# Altium PCB bcomed.PcbDoc
Units mm, origin at the board's own origin, x right, y up, seen from the top; angles counter-clockwise.
Board outline 178.94 x 147.32 mm, 2 copper layers (Top Layer, Bottom Layer); 79 components, 71 nets, 264 pads, 45 vias.
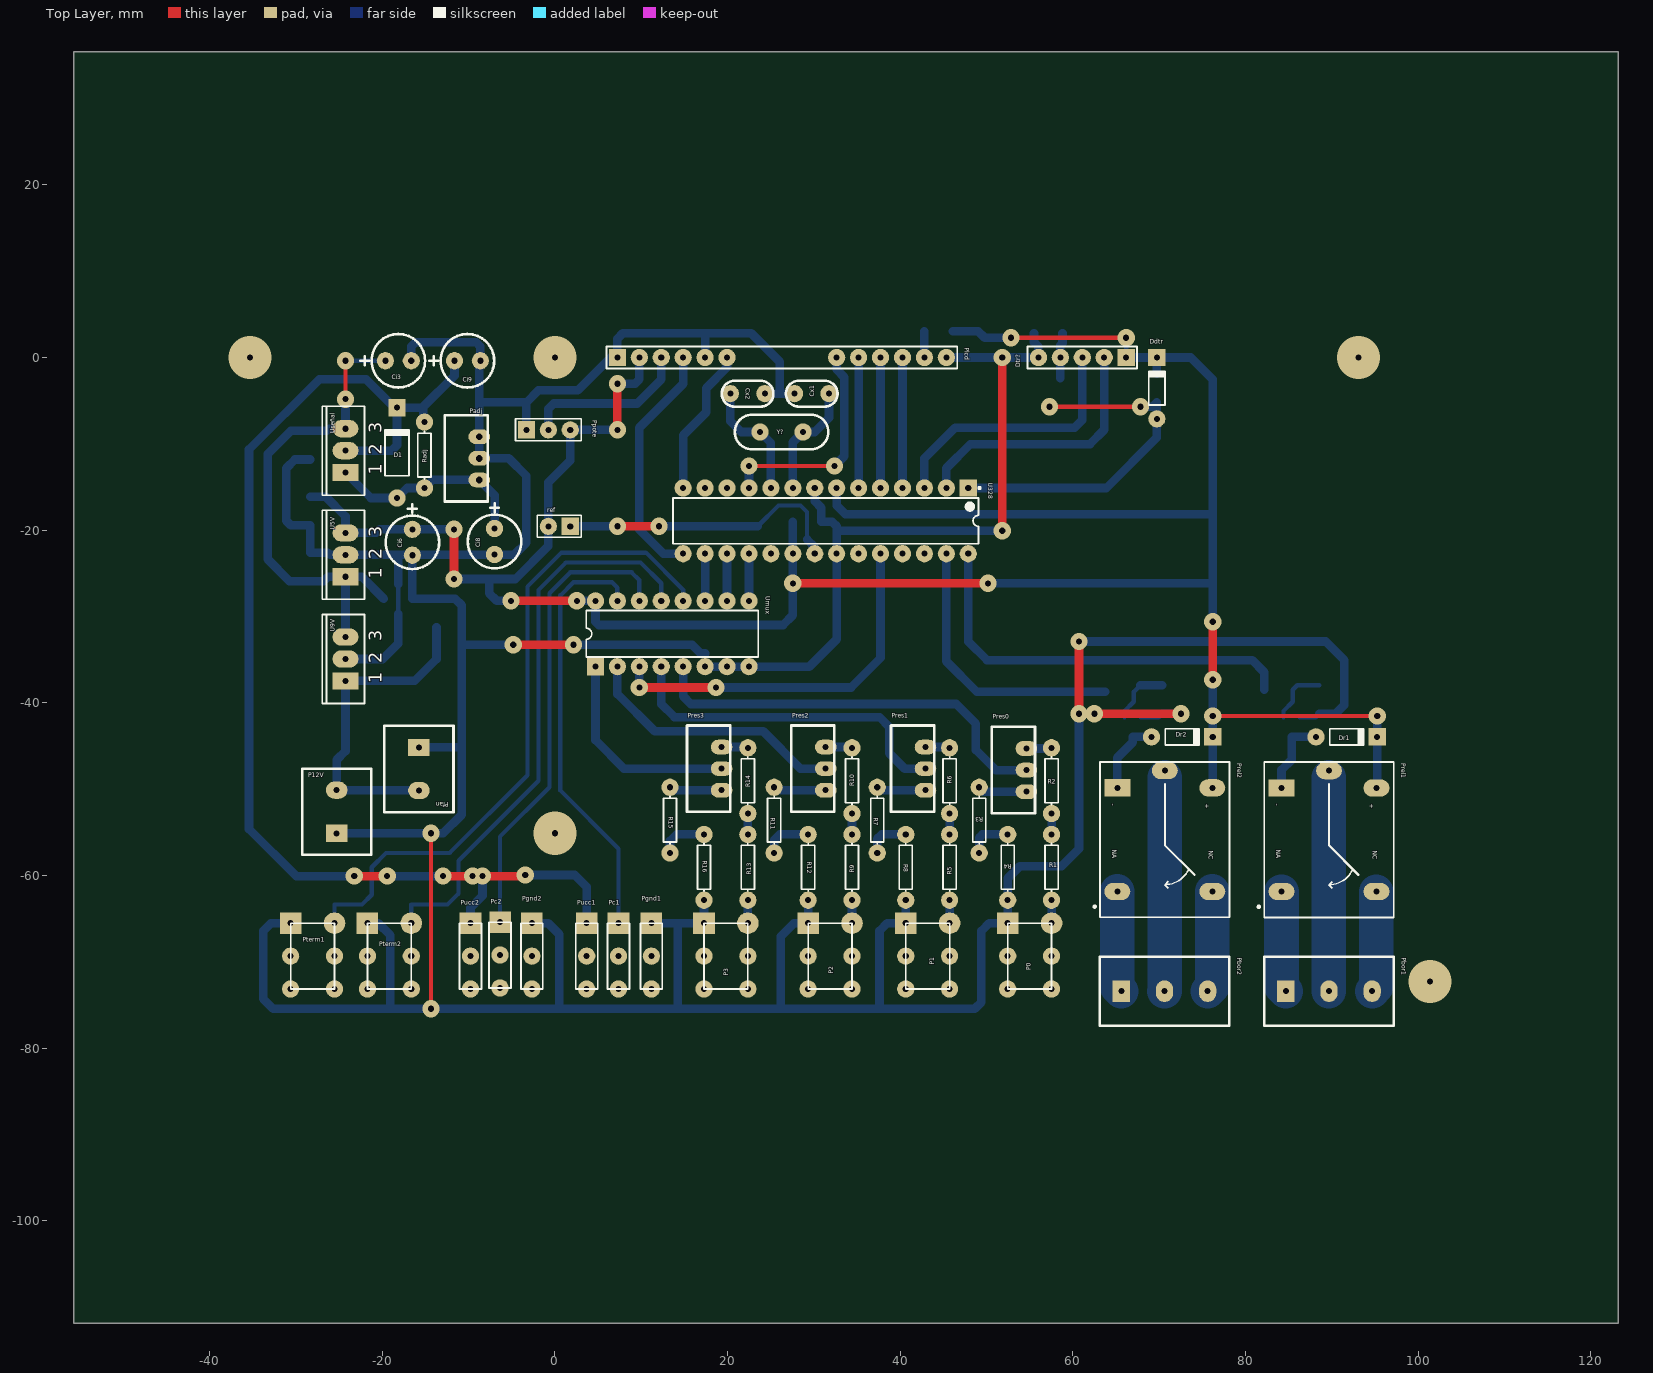
[diagram p0: Top Layer view]
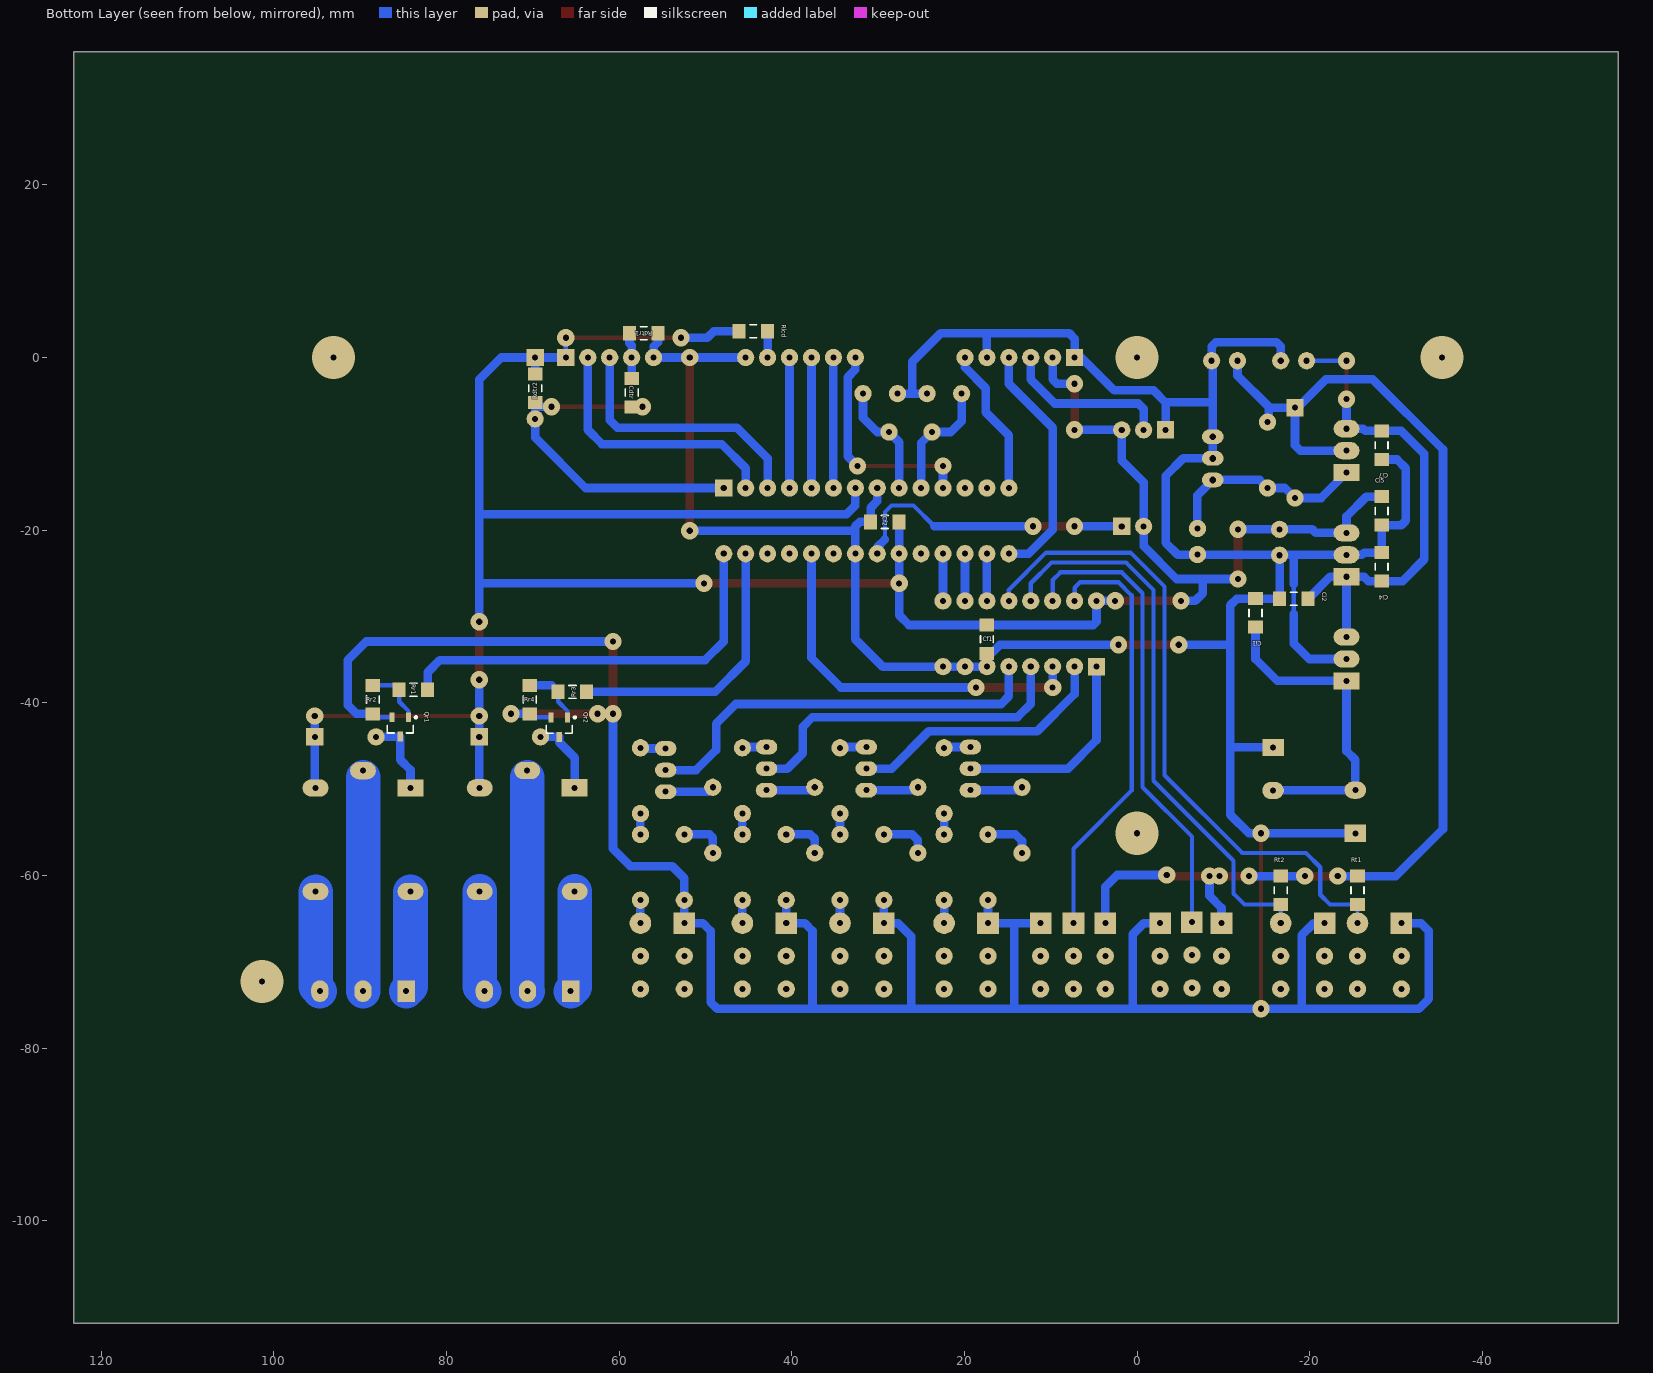
[diagram p1: Bottom Layer view, seen from below]

## Layer stack, top to bottom
Top Solder: solder mask 0.0102, Solder Resist, Dk 3.5
Top Layer: signal copper 0.0356
Dielectric 1: dielectric 0.32, FR-4, Dk 4.8
Bottom Layer: signal copper 0.0356
Bottom Solder: solder mask 0.0102, Solder Resist, Dk 3.5

## Board outline
-55.753,-111.887 -55.753,35.433 123.19,35.433 123.19,-111.887

## Design rules (kind name [scope] priority, off if disabled: settings)
Clearance [All] p1 off: gap=0.254 ignorepadtopadclearanceinfootprint=FALSE except(0: Arc-Hole Track-Hole SMDPad-Hole THPad-Hole Via-Hole Fill-Hole Poly-Hole Region-Hole Text-Hole)
ComponentClearance [All] p1 off: gap=0.254 collisioncheckmode=3 verticalgap=0.254 showdistances=FALSE
Height [All] p1 off: minheight=0 maxheight=25.4 prefheight=12.7
PolygonConnect [All] p1: connectstyle=Relief reliefconductorwidth=0.254 reliefentries=4 polygonreliefangle="90 Angle" airgapwidth=0.254
RoutingVias [All] p1: holewidth=0.711 width=1.27 viastyle="Through Hole" minholewidth=0.711 minwidth=1.27 maxholewidth=0.711 maxwidth=1.27
SolderMaskExpansion [All] p1: expansion=0.102
Width [All] p1: maxlimit=10 minlimit=0.5 preferedwidth=1
28 further rules are at their usual default settings.

## Components (designator, comment, footprint, x,y, rotation, side; value= is the part's Value field where it differs from the comment)
Cdtr "Cap" 1206ancho 58.547,-4.064 r0 bottom value=100pF
Cf1 "Cap" 1206ancho 17.399,-32.639 r180 bottom value=100nF
Cf2 "Cap" 1206ancho 29.21,-19.05 r270 bottom value=100nF
Ci1 "Cap" 1206ancho -13.716,-29.591 r0 bottom value=100pF
Ci2 "Cap" 1206ancho -18.161,-27.94 r270 bottom value=100pF
Ci3 "Cap Pol1" CAP-D6P3 -15.065,-0.381 r180 top value=10uF
Ci4 "Cap" 1206ancho -28.321,-24.257 r0 bottom value=100pF
Ci5 "Cap" 1206ancho -28.321,-17.78 r180 bottom value=100pF
Ci6 "Cap Pol1" CAP-D6P3 -16.51,-24.48 r90 top value=10uF
Ci7 "Cap" 1206ancho -28.321,-10.16 r0 bottom value=100pF
Ci8 "Cap Pol1" CAP-D6P3 -6.985,-24.384 r90 top value=10uF
Ci9 "Cap Pol1" CAP-D6P3 -7.064,-0.381 r180 top value=1uF
Cx1 "Cap" Cap4 31.75,-4.191 r180 top value=100pF
Cx2 "Cap" Cap4 20.32,-4.191 r0 top value=100pF
D1 "Diode 1N4007" DO-41 -18.288,-11.049 r90 top
Ddtr "Diode 1N4148" DO-35 69.723,-3.556 r90 top
Dr1 "Diode 1N4148" DO-35 91.7,-43.942 r0 top
Dr2 "Diode 1N4148" DO-35 72.65,-43.942 r0 top
Dtr? "Header 5" HDR1X5 66.167,0 r180 top
P0 "Header 3X2" "conector cable" 57.531,-65.532 r90 top
P1 "Header 3X2" "conector cable" 45.72,-65.532 r90 top
P2 "Header 3X2" "conector cable" 34.417,-65.532 r90 top
P3 "Header 3X2" "conector cable" 22.352,-65.532 r90 top
P12V "Header 2" Bornera-2 -25.273,-55.118 r90 top
Padj "Header 3" PRESET2#1 -8.763,-14.184 r90 top
Pbor1 "Header 3" Bornera-3 89.662,-73.406 r0 top
Pbor2 "Header 3" Bornera-3 70.612,-73.406 r0 top
Pc1 "Header 3" "conector cable simple" 7.366,-66.802 r90 top
Pc2 "Header 3" "conector cable simple" -6.35,-66.675 r90 top
Pfan "Header 2" Bornera-2 -15.748,-45.165 r270 top
Pgnd1 "Header 3" "conector cable simple" 11.176,-66.802 r90 top
Pgnd2 "Header 3" "conector cable simple" -2.667,-66.802 r90 top
Plcd "Header 16" HDR1X16 7.239,0 r0 top
Ppote "Header 3" HDR1X3 -3.302,-8.382 r0 top
Prel1 "Header 5" "Relay 5V" 85.344,-65.532 r270 top
Prel2 "Header 5" "Relay 5V" 66.333,-65.518 r270 top
Pres0 "Header 3" PRESET2#2 54.61,-50.292 r90 top
Pres1 "Header 3" PRESET2#2 42.926,-50.125 r90 top
Pres2 "Header 3" PRESET2#2 31.369,-50.125 r90 top
Pres3 "Header 3" PRESET2#2 19.304,-50.125 r90 top
Pterm1 "Header 3X2" "conector cable" -25.527,-65.532 r90 top
Pterm2 "Header 3X2" "conector cable" -16.637,-65.532 r90 top
Pucc1 "Header 3" "conector cable simple" 3.683,-66.802 r90 top
Pucc2 "Header 3" "conector cable simple" -9.779,-66.802 r90 top
Qr1 "BC817-40" SOT-23A_N 85.344,-42.799 r270 bottom
Qr2 "BC817-40" SOT-23A_N 66.925,-42.817 r270 bottom
R1 "Res1" AXIAL-0.3 57.531,-59.055 r90 top value=1K
R2 "Res1" AXIAL-0.3 57.531,-49.022 r90 top value=1K
R3 "Res1" AXIAL-0.3 49.149,-53.594 r270 top value=1K
R4 "Res1" AXIAL-0.3 52.451,-59.055 r270 top value=1K
R5 "Res1" AXIAL-0.3 45.72,-59.055 r90 top value=1K
R6 "Res1" AXIAL-0.3 45.72,-49.022 r90 top value=1K
R7 "Res1" AXIAL-0.3 37.338,-53.594 r270 top value=1K
R8 "Res1" AXIAL-0.3 40.64,-59.055 r270 top value=1K
R9 "Res1" AXIAL-0.3 34.417,-59.055 r90 top value=1K
R10 "Res1" AXIAL-0.3 34.417,-49.022 r90 top value=1K
R11 "Res1" AXIAL-0.3 25.4,-53.594 r270 top value=1K
R12 "Res1" AXIAL-0.3 29.337,-59.055 r270 top value=1K
R13 "Res1" AXIAL-0.3 22.352,-59.055 r90 top value=1K
R14 "Res1" AXIAL-0.3 22.352,-49.022 r90 top value=1K
R15 "Res1" AXIAL-0.3 13.335,-53.594 r270 top value=1K
R16 "Res1" AXIAL-0.3 17.272,-59.055 r270 top value=1K
Radj "Res1" AXIAL-0.3 -15.113,-11.303 r90 top value=120
Rdtr1 "Res1" 1206ancho 57.15,2.794 r90 bottom value=10K
Rdtr2 "Res1" 1206ancho 69.723,-3.556 r180 bottom value=1K
ref "Header 2" HDR1X2 1.778,-19.558 r180 top
Rlcd "Res1" 1206ancho 44.45,3.048 r270 bottom value=100
Rr1 "Res1" 1206ancho 83.82,-38.481 r90 bottom value=1K
Rr2 "Res1" 1206ancho 88.519,-39.624 r180 bottom value=10K
Rr3 "Res1" 1206ancho 65.405,-38.735 r90 bottom value=1K
Rr4 "Res1" 1206ancho 70.358,-39.624 r180 bottom value=10K
Rt1 "Res1" 1206ancho -25.527,-61.722 r180 bottom value=10K
Rt2 "Res1" 1206ancho -16.637,-61.722 r180 bottom value=10K
U5V "MC78M05CT" 221A-09 -24.257,-22.86 r90 top
U9V "MC78M09CT" 221A-09 -24.257,-34.925 r90 top
U328 "ATmega328P-PU" 28P3 31.369,-18.923 r270 top
Umux "MC14051BCL" 620-10 13.589,-32.004 r0 top
Useñal "LM317BT" 221A-06 -24.257,-10.795 r90 top
Y? "XTAL" Cristal 23.749,-8.636 r0 top

## Footprints (in the part's own frame and the unit in brackets; to place one, negate y for a bottom-side part, rotate by r counter-clockwise, add the part's x,y. Pads: shape width x height; smd on the part's side, far side on the other; paste and mask are expansions set on the pad)
28P3 [mm] "DIP, 28-Leads, Row Spacing 7.62mm, Pitch 2.54mm, Body 34.67x7.3mm"
  rect 2x2 hole 0.7: 1(-3.81,16.51)
  round 2 hole 0.7: 2(-3.81,13.97) 3(-3.81,11.43) 4(-3.81,8.89) 5(-3.81,6.35) 6(-3.81,3.81) 7(-3.81,1.27) 8(-3.81,-1.27) 9(-3.81,-3.81) 10(-3.81,-6.35) 11(-3.81,-8.89) 12(-3.81,-11.43) 13(-3.81,-13.97) 14(-3.81,-16.51) 15(3.81,-16.51) 16(3.81,-13.97) 17(3.81,-11.43) 18(3.81,-8.89) 19(3.81,-6.35) 20(3.81,-3.81) 21(3.81,-1.27) 22(3.81,1.27) 23(3.81,3.81) 24(3.81,6.35) 25(3.81,8.89) 26(3.81,11.43) 27(3.81,13.97) 28(3.81,16.51)
  silkscreen extent -3.93,-17.7 2.65,17.94, body extent -3.6,-17.65 3.6,17.65, height 4.58
221A-06 [mm] "TO, Thru-Hole, Vertical, Heatsink Mounted; 3 In-Line Leads; Pitch 2.54 mm"
  rect 2x3 hole 0.7: 1(-2.54,0)
  oval 2x3 hole 0.7: 2(0,0) 3(2.54,0)
  silkscreen extent -5.15,-2.2 5.15,2.7
221A-09 [mm] "TO, Thru-Hole, Vertical, Heatsink Mounted; 3 In-Line Leads; Pitch 2.54 mm"
  rect 2x3 hole 0.7: 1(-2.54,0)
  oval 2x3 hole 0.7: 2(0,0) 3(2.54,0)
  silkscreen extent -5.15,-2.2 5.15,2.7
620-10 [mm] "DIP; 16 Leads; Row Spacing 7.62 mm; Pitch 2.54 mm"
  rect 2x2 hole 0.7: 1(-8.89,-3.81)
  round 2 hole 0.7: 2(-6.35,-3.81) 3(-3.81,-3.81) 4(-1.27,-3.81) 5(1.27,-3.81) 6(3.81,-3.81) 7(6.35,-3.81) 8(8.89,-3.81) 9(8.89,3.81) 10(6.35,3.81) 11(3.81,3.81) 12(1.27,3.81) 13(-1.27,3.81) 14(-3.81,3.81) 15(-6.35,3.81) 16(-8.89,3.81)
  silkscreen extent -9.95,-2.7 9.95,2.7
1206ancho [mm]
  rect 1.7x1.5 smd: 1(0,-1.651) 2(0,1.651)
  silkscreen extent -0.75,-0.4 0.75,0.4
AXIAL-0.3 [mm] "Axial Device, Thru-Hole; 2 Leads; 0.3 in Pin Spacing"
  round 2 hole 0.7: 1(-3.81,0) 2(3.81,0)
  silkscreen extent -2.77,-0.76 2.77,0.76
Bornera-2 [mm]
  rect 2x2.5 hole 0.7: 1(0,0)
  oval 2x2.5 hole 0.7: 2(5,0)
  silkscreen extent -2.5,-4 7.5,4
Bornera-3 [mm]
  rect 2x2.5 hole 0.7: 1(-5,0)
  oval 2x2.5 hole 0.7: 2(0,0) 3(5,0)
  silkscreen extent -7.5,-4 7.5,4
Cap4 [mm]
  round 2 hole 0.7: 1(0,0) 2(4,0)
  silkscreen extent -0.99,-1.5 4.99,1.5
CAP-D6P3 [mm]
  round 2 hole 0.7: 1(4.572,0) 2(1.572,0)
  silkscreen extent -0.03,-3.1 7.49,3.1
"conector cable" [mm]
  rect 2.5x2.5 hole 0.7: 1(0,5.08)
  round 2.5 hole 0.7: 2(0,0)
  round 2 hole 0.7: 3(-3.81,5.08) 4(-3.81,0) 5(-7.62,5.08) 6(-7.62,0)
  silkscreen extent -7.62,0 0,5.08
"conector cable simple" [mm]
  rect 2.5x2.5 hole 0.7: 1(1.27,0)
  round 2 hole 0.7: 2(-2.54,0) 3(-6.35,0)
  silkscreen extent -6.35,-1.27 1.27,1.27
Cristal [mm]
  round 2 hole 0.7: 1(0,0) 2(5,0)
  silkscreen extent -2.9,-2 7.91,2.02, body extent -3,-2.25 8,2.25, height 13.2
DO-35 [mm] "Diode, Axial; Body 3.8 x 1.9 mm (LxDia. max), Lead Dia. 0.53 mm (max)"
  round 2 hole 0.7: 1(-3.55,0)
  rect 2x2 hole 0.7: 2(3.55,0)
  silkscreen extent -1.95,-0.95 2.05,0.95
DO-41 [mm] "Diode, Axial; Body 5.2 x 2.7 mm (LxDia. max), Lead Dia. 0.86 mm (max)"
  round 2 hole 0.7: 1(-5.23,0)
  rect 2x2 hole 0.7: 2(5.23,0)
  silkscreen extent -2.65,-1.4 2.75,1.4
HDR1X2 [mm] "Connector; Header; 2 Position"
  rect 2x2 hole 0.7: 1(0,0)
  round 2 hole 0.7: 2(2.54,0)
  silkscreen extent -1.27,-1.27 3.81,1.27
HDR1X3 [mm] "Connector; Header; 3 Position"
  rect 2x2 hole 0.7: 1(0,0)
  round 2 hole 0.7: 2(2.54,0) 3(5.08,0)
  silkscreen extent -1.27,-1.27 6.35,1.27
HDR1X5 [mm] "Connector; Header; 5 Position"
  rect 2x2 hole 0.7: 1(0,0)
  round 2 hole 0.7: 2(2.54,0) 3(5.08,0) 4(7.62,0) 5(10.16,0)
  silkscreen extent -1.27,-1.27 11.43,1.27
HDR1X16 [mm] "Connector; Header; 16 Position"
  rect 2x2 hole 0.7: 1(0,0)
  round 2 hole 0.7: 2(2.54,0) 3(5.08,0) 4(7.62,0) 5(10.16,0) 6(12.7,0) 11(25.4,0) 12(27.94,0) 13(30.48,0) 14(33.02,0) 15(35.56,0) 16(38.1,0)
  round 0 all layers, no hole: 7(15.24,0) 8(17.78,0) 9(20.32,0) 10(22.86,0)
  silkscreen extent -1.27,-1.27 39.37,1.27
PRESET2#1 [mm]
  oval 1.7x2.5 hole 0.8: 1(0,0) 2(2.5,0) 3(5,0)
  silkscreen extent -2.5,-1 7.5,4
PRESET2#2 [mm]
  oval 1.7x2.5 hole 0.7: 1(0,0) 2(2.5,0) 3(5,0)
  silkscreen extent -2.5,-1 7.5,4
"Relay 5V" [mm]
  oval 2x3 hole 0.7: 1(-17.669,4.318) 2(-3.669,9.818) 3(-3.669,-1.182) 4(-15.669,9.818)
  rect 2x3 hole 0.7: 5(-15.669,-1.182)
  silkscreen extent -18.67,-3.93 -0.67,11.82
SOT-23A_N [mm] "SOT23, 3-Leads, Body 2.9x1.3mm, Pitch 0.95mm, Lead Span 2.3mm, IPC Medium Density"
  rect 1.15x0.6 smd: 1(-1.125,0.95) 2(-1.125,-0.95) 3(1.125,0)
  silkscreen extent -1.25,-1.5 0.7,1.92, body extent -0.7,-1.5 0.7,1.5, height 1.09

## Part data
Cdtr Cf1 Cf2 Ci1 Ci2 Ci4 Ci5 Ci7 Cx1 Cx2: "Capacitor", LatestRevisionDate=17-Jul-2002, LatestRevisionNote="Re-released for DXP Platform.", PackageDescription="Radial Cap, Thru-Hole; 2 Leads; 0.3 in Pin Spacing", PackageReference=RAD-0.3, Published=8-Jun-2000, Publisher="Altium Limited"
Ci3 Ci6 Ci8 Ci9: "Polarized Capacitor (Radial)", LatestRevisionDate=17-Jul-2002, LatestRevisionNote="Re-released for DXP Platform.", PackageDescription="Polarized Capacitor (Radial); 2 Leads", PackageReference=RB7.6-15, Published=8-Jun-2000, Publisher="Altium Limited"
D1: "1 Amp General Purpose Rectifier", Code_JEDEC=DO-204-AL, ComponentLink1Description="Manufacturer Link", ComponentLink1URL=http://www.fairchildsemi.com/, ComponentLink2Description=Datasheet, ComponentLink2URL=http://www.fairchildsemi.com/ds/1N%2F1N4001.pdf, DatasheetVersion=1998, LatestRevisionDate=17-Jul-2002, LatestRevisionNote="Re-released for DXP Platform.", PackageDescription="Diode, Axial; Body 5.2 x 2.7 mm (LxDia. max), Lead Dia. 0.86 mm (max)", PackageReference=DO-41, PackageVersion=Aug-1999, Published=8-Jun-2000, Publisher="Altium Limited"
Ddtr Dr1 Dr2: "High Conductance Fast Diode", Code_JEDEC=DO-204-AH, ComponentLink1Description="Manufacturer Link", ComponentLink1URL=http://www.fairchildsemi.com/, ComponentLink2Description=Datasheet, ComponentLink2URL=http://www.fairchildsemi.com/ds/1N%2F1N4148.pdf, DatasheetVersion=1997, LatestRevisionDate=17-Jul-2002, LatestRevisionNote="Re-released for DXP Platform.", PackageDescription="Diode, Axial; Body 3.8 x 1.9 mm (LxDia. max), Lead Dia. 0.53 mm (max)", PackageReference=DO-35, Published=8-Jun-2000, Publisher="Altium Limited"
Dtr? Prel1 Prel2: "Header, 5-Pin", LatestRevisionDate=17-Jul-2002, LatestRevisionNote="Re-released for DXP Platform.", Publisher="Altium Limited"
P0 P1 P2 P3 Pterm1 Pterm2: "Header, 3-Pin, Dual row", LatestRevisionDate=17-Jul-2002, LatestRevisionNote="Re-released for DXP Platform.", Publisher="Altium Limited"
P12V Pfan ref: "Header, 2-Pin", LatestRevisionDate=17-Jul-2002, LatestRevisionNote="Re-released for DXP Platform.", Publisher="Altium Limited"
Padj Pbor1 Pbor2 Pc1 Pc2 Pgnd1 Pgnd2 Ppote Pres0 Pres1 Pres2 Pres3 Pucc1 Pucc2: "Header, 3-Pin", LatestRevisionDate=17-Jul-2002, LatestRevisionNote="Re-released for DXP Platform.", Publisher="Altium Limited"
Plcd: "Header, 16-Pin", LatestRevisionDate=17-Jul-2002, LatestRevisionNote="Re-released for DXP Platform.", Publisher="Altium Limited"
Qr1 Qr2: "NPN General Purpose Amplifier", ComponentLink1Description="Manufacturer Link", ComponentLink1URL=http://www.fairchildsemi.com/, ComponentLink2Description="Discontinuation Notice", ComponentLink2URL=http://www.fairchildsemi.com/obsolete/obs.jsp, DatasheetVersion=1997, LatestRevisionDate=20-Nov-2009, LatestRevisionNote="IPC-7351 Footprint Added.", PackageDescription="3-Pin SOT-23 Package 0.95 mm Pitch, 2.3 mm Lead Span", PackageReference=SOT-23A, PackageVersion=Sep-1998, Published=8-Jun-2000, Publisher="Altium Limited"
R1 R2 R3 R4 R5 R6 R7 R8 R9 R10 R11 R12 R13 R14 R15 R16 Radj Rdtr1 Rdtr2 Rlcd Rr1 Rr2 Rr3 Rr4 Rt1 Rt2: "Resistor", LatestRevisionDate=17-Jul-2002, LatestRevisionNote="Re-released for DXP Platform.", PackageDescription="Axial Device, Thru-Hole; 2 Leads; 0.3 in Pin Spacing", PackageReference=AXIAL-0.3, Published=8-Jun-2000, Publisher="Altium Limited"
U5V U9V: "Three-Terminal Medium Current Positive Voltage Regulator", Code_JEDEC=TO-262-AA, ComponentLink1Description="Manufacturer Link", ComponentLink1URL=http://www.onsemi.com/site/products/taxonomy/0,4438,503,00.html, ComponentLink2Description=Datasheet, ComponentLink2URL=http://www.onsemi.com/pub/Collateral/MC78M00-D.PDF, DatasheetVersion=Apr-2000, Note="Heatsink surface connected to Pin 2", PackageDescription="TO, Thru-Hole, Vertical, Heatsink Mounted; 3 In-Line Leads; Pitch 2.54 mm", PackageReference=221A-09, Published=15-Apr-2002, Publisher="Altium Limited"
U328: "8-bit AVR Microcontroller, 32KB Flash, 1KB EEPROM, 2KB SRAM, 28-pin PDIP, Industrial Grade (-40°C to 85°C)", Supplier Part Number 1=ATMEGA328P-PU-ND, ComponentLink1Description="Manufacturer Link", ComponentLink1URL=http://www.atmel.com/products/avr/default.asp?, ComponentLink2Description="ATmega48A/48PA/88A/88PA/168A/168PA/328/328P Datasheet", ComponentLink2URL=http://www.atmel.com/dyn/resources/prod_documents/8271.pdf, ComponentLink3Description="ATmega48A/48PA/88A/88PA/168A/168PA/328/328P Summary", ComponentLink3URL=http://www.atmel.com/dyn/resources/prod_documents/8271S.pdf, ComponentLink4Description="Atmel.com Home", ComponentLink4URL=http://www.atmel.com, DatasheetVersion="revA, Jan-2010", PackageDescription="28-lead (0.300\"/7.62mm Wide) Plastic Dual Inline Package (PDIP)", PackageReference=28P3, PackageVersion="revB, Sep-2001", Published=1-Apr-2010, Publisher="Altium Limited", Supplier 1=Digi-Key, Supplier 2=Farnell, Supplier 3=Mouser, Supplier Part Number 2=1715487, Supplier Part Number 3=556-ATMEGA328P-PU
Umux: "8-Channel Analog Multiplexer/Demultiplexer", ComponentLink1Description="Manufacturer Link", ComponentLink1URL=http://www.onsemi.com/, ComponentLink2Description=Datasheet, ComponentLink2URL=http://www.onsemi.com/pub/Collateral/MC14051B-D.PDF, DatasheetVersion=1995, PackageDescription="DIP; 16 Leads; Row Spacing 7.62 mm; Pitch 2.54 mm", PackageReference=620-10, PackageVersion=1996, Published=15-Apr-2002, Publisher="Altium Limited"
Useñal: "Three-Terminal Adjustable Output Positive Voltage Regulator", Code_JEDEC=TO-262-AA, ComponentLink1Description="Manufacturer Link", ComponentLink1URL=http://www.onsemi.com/site/products/taxonomy/0,4438,503,00.html, ComponentLink2Description=Datasheet, ComponentLink2URL=http://www.onsemi.com/pub/Collateral/LM317-D.PDF, DatasheetVersion=1996, Note="Heatsink surface connected to Pin 2", PackageDescription="TO, Thru-Hole, Vertical, Heatsink Mounted; 3 In-Line Leads; Pitch 2.54 mm", PackageReference=221A-06, PackageVersion=1997, Published=15-Apr-2002, Publisher="Altium Limited"
Y?: "Crystal Oscillator", LatestRevisionDate=17-Jul-2002, LatestRevisionNote="Re-released for DXP Platform.", PackageDescription="Crystal, Thru-Hole; 2 Leads; Body 3.1 x 8.2 mm (Dia.xH)", PackageReference=R38, Published=8-Jun-2000, Publisher="Altium Limited"

## Via types
v1: diameter 2, hole 0.711, Top Layer to Bottom Layer, 40 vias
v2: diameter 5, hole 0.711, Top Layer to Bottom Layer, 5 vias

## Nets (pads, with @x,y where several pads share a name; then routed paths per layer and width w, separated by ;. In a path a pad name is that pad's centre, name@x,y a point inside that pad or via, vN(x,y) a via of type N, cw(c..) or ccw(c..) an arc to the next point about the centre after c; other vN are vias at no path point)
GND: Cf1.1 Cf2.1 Ci1.1 Ci2.1 Ci3.2 Ci4.1 Ci5.1 Ci6.2 Ci7.2 Ci8.2 Ci9.2 Cx1.2 Cx2.2 Dtr?.5 P0.1 P1.1 P2.1 P3.1 P12V.1 Padj.2 Padj.3 Pfan.1 Pgnd1.1 Pgnd2.1 Plcd.1 Plcd.5 Plcd.16 Ppote.1 Pterm1.1 Pterm2.1 Qr1.2 Qr2.2 R4.2 R8.2 R12.2 R16.2 Rdtr1.1 Rr2.1 Rr4.1 U5V.2 U9V.2 U328.8 U328.22 Umux.6 Umux.7 Umux.8 | length 620.2
  Top Layer w0.5: v1(-14.351,-75.438) v1(-14.351,-55.118)
  Top Layer w1: v1(-4.826,-33.274) v1(2.159,-33.274) ; v1(51.816,-20.066) v1(51.816,0) ; v1(60.706,-41.275) v1(60.706,-32.893) ; v1(62.484,-41.275) v1(72.517,-41.275)
  Bottom Layer w0.5: -18.161,-29.718 -18.161,-26.289 ; Qr2.2 69.941,-41.692 Rr4.1 ; Qr1.2 88.12,-41.674 Rr2.1
  Bottom Layer w1: Pterm1.1 -32.893,-65.532 -33.782,-66.421 -33.782,-74.295 -32.639,-75.438 -19.05,-75.438 ; Ci7.2 -30.099,-11.811 -31.115,-12.827 -31.115,-18.923 -30.607,-19.431 Ci5.1 Ci4.1 -26.289,-22.606 -26.035,-22.86 U5V.2 -18.161,-22.86 ; P12V.1 v1(-14.351,-55.118) -12.954,-55.118 -10.795,-52.959 -10.795,-45.165 ; U9V.2 -19.939,-34.925 -18.161,-33.147 -18.161,-29.718 ; Pterm2.1 -20.447,-65.532 -19.05,-66.929 -19.05,-75.438 ; -18.161,-26.289 -18.161,-22.86 ; Ci3.2 -16.637,1.27 -16.129,1.778 -9.144,1.778 -8.636,1.27 Ci9.2 -8.763,-0.508 -8.763,-5.207 ; Ci6.2 Ci2.1 Ci1.1 -11.557,-27.94 -10.795,-28.702 -10.795,-33.274 ; Pfan.1 -10.795,-45.165 ; v1(-4.826,-33.274) -10.795,-33.274 ; Ppote.1 -3.302,-5.207 ; Pgnd2.1 -0.762,-65.532 0.508,-66.802 0.508,-75.438 ; v1(2.159,-33.274) 15.875,-33.274 16.891,-34.29 Cf1.1 ; Pgnd1.1 14.224,-65.532 ; R16.2 P3.1 14.224,-65.532 ; Umux.6 Umux.7 Umux.8 29.464,-35.814 32.639,-32.639 U328.22 32.639,-20.066 ; Plcd.5 17.399,2.794 ; Cx2.2 26.035,-4.191 ; Cx1.2 26.035,-4.191 ; R12.2 P2.1 27.686,-65.532 26.162,-67.056 26.162,-75.438 ; U328.8 30.099,-16.637 30.861,-17.399 Cf2.1 32.131,-19.05 32.639,-19.558 32.639,-20.066 ; 37.592,-75.184 37.592,-66.421 38.481,-65.532 P1.1 R8.2 ; Plcd.16 v1(51.816,0) Dtr?.5 56.007,1.27 55.499,1.778 Rdtr1.1 ; v1(51.816,-20.066) 32.639,-20.066 ; v1(60.706,-32.893) 89.281,-32.893 91.44,-35.052 91.44,-40.259 90.424,-41.275 Rr2.1 ; v1(62.484,-41.275) v1(60.706,-41.275) 60.706,-56.896 58.674,-58.928 53.848,-58.928 52.451,-60.325 R4.2 P0.1 50.292,-65.532 49.403,-66.421 49.403,-74.676 48.641,-75.438 26.162,-75.438 ; Rr4.1 v1(72.517,-41.275) ; -19.05,-75.438 v1(-14.351,-75.438) 0.508,-75.438 ; -18.161,-22.86 -4.699,-22.86 -3.302,-21.463 -3.302,-13.716 -5.334,-11.684 Padj.2 Padj.3 -8.763,-5.207 ; -10.795,-45.165 -10.795,-33.274 ; -8.763,-5.207 -3.302,-5.207 ; -3.302,-5.207 -1.905,-3.81 2.667,-3.81 6.477,0 Plcd.1 7.239,2.159 7.874,2.794 17.399,2.794 ; 0.508,-75.438 14.224,-75.438 ; 14.224,-75.438 14.224,-65.532 ; 14.224,-75.438 26.162,-75.438 ; 17.399,2.794 22.733,2.794 26.035,-0.508 26.035,-4.191
NetCdtr_1: Cdtr.1 Dtr?.4 Rdtr1.2 | length 5.7
  Bottom Layer w0.5: Rdtr1.2@58.547,2.54 Rdtr1.2
  Bottom Layer w1: Cdtr.1 Dtr?.4 58.547,1.397 58.801,1.651 Rdtr1.2
NetCdtr_2: Cdtr.2 Ddtr.1 Rdtr2.1 U328.1 | length 41
  Top Layer w0.5: v1(57.277,-5.715) v1(67.818,-5.715)
  Bottom Layer w1: U328.1 63.881,-15.113 69.723,-9.271 Ddtr.1 Rdtr2.1 69.215,-5.715 v1(67.818,-5.715)
NetCi1_2: Ci1.2 P12V.2 Pfan.2 U9V.1 | length 37.9
  Bottom Layer w1: Pfan.2 -15.795,-50.118 P12V.2 -25.273,-46.609 -24.257,-45.593 U9V.1 -16.256,-37.465 -13.716,-34.925 Ci1.2
NetCi2_2: Ci2.2 Ci3.1 Ci4.2 Ci7.1 U5V.1 U9V.3 Useñal.3 | length 57.7
  Top Layer w0.5: v1(-24.257,-4.826) v1(-24.257,-0.381)
  Bottom Layer w0.5: v1(-24.257,-0.381) Ci3.1
  Bottom Layer w1: U9V.3 U5V.1 ; v1(-24.257,-4.826) Useñal.3 -26.162,-8.255 -26.416,-8.509 Ci7.1 -30.607,-8.509 -33.274,-11.176 -33.274,-23.368 -30.734,-25.908 Ci4.2 -26.797,-25.908 -26.289,-25.4 U5V.1 ; Ci2.2 -22.352,-25.4 U5V.1
NetCi8_1: Ci8.1 D1.1 Padj.1 Radj.1 Useñal.1 | length 23.9
  Bottom Layer w1: Useñal.1 -21.313,-16.279 D1.1 -17.122,-15.113 Radj.1 -14.184,-14.184 Padj.1 -6.985,-15.962 Ci8.1
NetCx1_1: Cx1.1 U328.9 Y?.2 | length 13.4
  Bottom Layer w1: U328.9 27.559,-9.826 Y?.2 30.099,-8.636 31.75,-6.985 Cx1.1
NetCx2_1: Cx2.1 U328.10 Y?.1 | length 14.1
  Bottom Layer w1: Cx2.1 20.32,-7.366 21.59,-8.636 Y?.1 25.019,-9.906 U328.10
NetDr1_1: Dr1.1 Prel1.5 Qr1.3 | length 9.2
  Bottom Layer w1: Prel1.5 84.162,-47.791 85.344,-46.609 Qr1.3 85.362,-43.942 Dr1.1
NetDr2_1: Dr2.1 Prel2.5 Qr2.3 | length 8.8
  Bottom Layer w1: Prel2.5 65.151,-46.355 66.925,-44.581 Qr2.3 Dr2.1
NetDtr?_2: Dtr?.2 U328.2 | length 30.8
  Bottom Layer w1: U328.2 45.339,-12.827 48.133,-10.033 61.976,-10.033 63.627,-8.382 Dtr?.2
NetDtr?_3: Dtr?.3 U328.3 | length 30.8
  Bottom Layer w1: U328.3 42.799,-11.684 46.355,-8.128 60.198,-8.128 61.087,-7.239 Dtr?.3
NetP0_2: P0.2 R1.1 | length 2.7
  Bottom Layer w1: P0.2 R1.1
NetP1_2: P1.2 R5.1 | length 2.7
  Bottom Layer w1: P1.2 R5.1
NetP2_2: P2.2 R9.1 | length 2.7
  Bottom Layer w1: P2.2 R9.1
NetP3_2: P3.2 R13.1 | length 2.7
  Bottom Layer w1: P3.2 R13.1
NetPbor1_1: Pbor1.1 Prel1.3 | length 11.8
  Bottom Layer w4: Prel1.3 84.162,-72.906 Pbor1.1
NetPbor1_2: Pbor1.2 Prel1.1 | length 24.8
  Bottom Layer w4: Pbor1.2 Prel1.1@89.662,-48.641
NetPbor1_3: Pbor1.3 Prel1.2 | length 11.8
  Bottom Layer w4: Pbor1.3 95.162,-72.906 Prel1.2
NetPbor2_1: Pbor2.1 Prel2.3 | length 11.7
  Bottom Layer w4: Prel2.3 65.151,-72.945 Pbor2.1
NetPbor2_2: Pbor2.2 Prel2.1 | length 24.8
  Bottom Layer w4: Pbor2.2 70.651,-73.367 Prel2.1@70.651,-48.641
NetPbor2_3: Pbor2.3 Prel2.2 | length 11.8
  Bottom Layer w4: Pbor2.3 76.151,-72.867 Prel2.2
NetPc1_1: Pc1.1 Umux.15 | length 49.8
  Bottom Layer w0.5: Umux.15 7.239,-26.67 6.604,-26.035 2.159,-26.035 0.635,-27.559 0.635,-50.165 7.366,-56.896 Pc1.1
NetPc2_1: Pc2.1 Umux.14 | length 54.7
  Bottom Layer w0.5: Pc2.1 -6.35,-55.499 -0.635,-49.784 -0.635,-27.305 1.778,-24.892 8.89,-24.892 9.779,-25.781 Umux.14
NetPlcd_3: Plcd.3 Ppote.2 | length 19.5
  Bottom Layer w1: Ppote.2 -0.762,-5.969 -0.127,-5.334 9.525,-5.334 12.319,-2.54 Plcd.3
NetPlcd_4: Plcd.4 U328.15 | length 28.3
  Bottom Layer w1: U328.15 12.573,-22.733 9.779,-19.939 9.779,-8.128 14.859,-3.048 Plcd.4
NetPlcd_6: Plcd.6 U328.14 | length 17.2
  Bottom Layer w1: U328.14 14.859,-9.017 17.526,-6.35 17.526,-3.556 19.939,-1.143 Plcd.6
NetPlcd_11: Plcd.11 U328.11 | length 25.1
  Top Layer w0.5: v1(22.479,-12.573) v1(32.385,-12.573)
  Bottom Layer w1: U328.11 v1@22.479,-13.335 ; v1(32.385,-12.573) 33.528,-11.43 33.528,-2.286 32.639,-1.397 Plcd.11
NetPlcd_12: Plcd.12 U328.6 | length 15.1
  Bottom Layer w1: U328.6 Plcd.12
NetPlcd_13: Plcd.13 U328.5 | length 15.1
  Bottom Layer w1: U328.5 Plcd.13
NetPlcd_14: Plcd.14 U328.4 | length 15.1
  Bottom Layer w1: U328.4 Plcd.14
NetPlcd_15: Plcd.15 Rlcd.2 | length 3
  Bottom Layer w1: Plcd.15 Rlcd.2
NetPres0_1: Pres0.1 R3.1 | length 5.7
  Bottom Layer w0.5: R3.1 R3.1@49.657,-50.292
  Bottom Layer w1: R3.1@49.657,-50.292 Pres0.1
NetPres0_2: Pres0.2 Umux.5 | length 48.5
  Bottom Layer w1: Umux.5 14.859,-39.243 15.748,-40.132 46.482,-40.132 48.768,-42.418 48.768,-45.466 51.094,-47.792 Pres0.2
NetPres0_3: Pres0.3 R2.2 | length 3
  Bottom Layer w0.5: R2.2@57.451,-45.292 R2.2
  Bottom Layer w1: Pres0.3 R2.2@57.451,-45.292
NetPres1_1: Pres1.1 R7.1 | length 5.7
  Bottom Layer w0.5: R7.1 R7.1@37.679,-50.125
  Bottom Layer w1: R7.1@37.679,-50.125 Pres1.1
NetPres1_2: Pres1.2 Umux.4 | length 39.8
  Bottom Layer w1: Umux.4 12.319,-40.132 13.843,-41.656 37.592,-41.656 38.735,-42.799 38.735,-45.847 40.513,-47.625 Pres1.2
NetPres1_3: Pres1.3 R6.2 | length 2.8
  Bottom Layer w0.5: R6.2@45.633,-45.125 R6.2
  Bottom Layer w1: Pres1.3 R6.2@45.633,-45.125
NetPres2_1: Pres2.1 R11.1 | length 6.1
  Bottom Layer w0.5: R11.1 R11.1@25.741,-50.125
  Bottom Layer w1: R11.1@25.741,-50.125 Pres2.1
NetPres2_2: Pres2.2 Umux.2 | length 30.9
  Bottom Layer w1: Umux.2 7.239,-38.989 11.557,-43.307 24.13,-43.307 28.448,-47.625 Pres2.2
NetPres2_3: Pres2.3 R10.2 | length 3.1
  Bottom Layer w0.5: R10.2@34.33,-45.125 R10.2
  Bottom Layer w1: Pres2.3 R10.2@34.33,-45.125
NetPres3_1: Pres3.1 R15.1 | length 6.1
  Bottom Layer w0.5: R15.1 R15.1@13.676,-50.125
  Bottom Layer w1: R15.1@13.676,-50.125 Pres3.1
NetPres3_2: Pres3.2 Umux.1 | length 24.5
  Bottom Layer w1: Umux.1 4.699,-44.323 8.001,-47.625 Pres3.2
NetPres3_3: Pres3.3 R14.2 | length 3.1
  Bottom Layer w0.5: R14.2@22.265,-45.125 R14.2
  Bottom Layer w1: Pres3.3 R14.2@22.265,-45.125
NetPterm1_2: Pterm1.2 Rt1.1 Umux.12 | length 77.1
  Bottom Layer w0.5: Pterm1.2 Rt1.1 -22.352,-63.373 -21.209,-62.23 -21.209,-59.055 -19.558,-57.404 -12.192,-57.404 -3.175,-48.387 -3.175,-26.543 0.762,-22.606 10.541,-22.606 14.859,-26.924 Umux.12
NetPterm2_2: Pterm2.2 Rt2.1 Umux.13 | length 65.7
  Bottom Layer w0.5: Pterm2.2 Rt2.1 -12.446,-63.373 -11.176,-62.103 -11.176,-58.293 -1.905,-49.022 -1.905,-26.924 1.27,-23.749 9.906,-23.749 12.319,-26.162 Umux.13
NetQr1_1: Qr1.1 Rr1.2 Rr2.2 | length 6.9
  Bottom Layer w0.5: Qr1.1 84.394,-40.955 85.471,-39.878 Rr1.2 85.979,-37.973 Rr2.2
NetQr2_1: Qr2.1 Rr3.2 Rr4.2 | length 7
  Bottom Layer w0.5: Qr2.1 65.975,-40.959 67.056,-39.878 Rr3.2 67.818,-37.973
  Bottom Layer w1: 67.818,-37.973 Rr4.2
NetR1_2: R1.2 R2.1 | length 2.4
  Bottom Layer w1: R1.2 R2.1
NetR3_2: R3.2 R4.1 | length 5.2
  Bottom Layer w1: R3.2 49.149,-55.626 49.53,-55.245 R4.1
NetR5_2: R5.2 R6.1 | length 2.4
  Bottom Layer w1: R5.2 R6.1
NetR7_2: R7.2 R8.1 | length 5.2
  Bottom Layer w1: R7.2 37.338,-55.753 37.846,-55.245 R8.1
NetR9_2: R9.2 R10.1 | length 2.4
  Bottom Layer w1: R9.2 R10.1
NetR11_2: R11.2 R12.1 | length 5.7
  Bottom Layer w1: R11.2 25.4,-55.88 26.035,-55.245 R12.1
NetR13_2: R13.2 R14.1 | length 2.4
  Bottom Layer w1: R13.2 R14.1
NetR15_2: R15.2 R16.1 | length 5.6
  Bottom Layer w1: R15.2 13.335,-56.007 14.097,-55.245 R16.1
Netref_1: ref.1 U328.21 | length 33.9
  Top Layer w1: v1(7.239,-19.558) v1(12.065,-19.558)
  Bottom Layer w0.5: 23.495,-19.558 25.908,-17.145 28.448,-17.145 29.21,-17.907 29.21,-21.082
  Bottom Layer w1: ref.1 v1(7.239,-19.558) ; v1(12.065,-19.558) 23.495,-19.558 ; 29.21,-21.082 30.099,-21.971 U328.21
NetRr1_1: Rr1.1 U328.28 | length 48
  Bottom Layer w1: U328.28 47.879,-32.893 50.038,-35.052 80.772,-35.052 82.169,-36.449 Rr1.1
NetRr3_1: Rr3.1 U328.27 | length 32.3
  Bottom Layer w1: U328.27 45.339,-35.179 48.895,-38.735 Rr3.1
NetU328_12: U328.12
NetU328_13: U328.13
NetU328_16: U328.16 Umux.11 | length 5.5
  Bottom Layer w1: Umux.11 U328.16
NetU328_17: U328.17 Umux.10 | length 5.5
  Bottom Layer w1: Umux.10 U328.17
NetU328_18: U328.18 Umux.9 | length 5.5
  Bottom Layer w1: Umux.9 U328.18
NetU328_19: U328.19
NetU328_23: U328.23
NetU328_24: U328.24 Umux.3 | length 43.8
  Top Layer w1: v1(9.779,-38.227) v1(18.669,-38.227)
  Bottom Layer w1: v1(9.779,-38.227) Umux.3 ; v1(18.669,-38.227) 34.29,-38.227 37.719,-34.798 U328.24
NetU328_25: U328.25
NetU328_26: U328.26
VCC: Cf1.2 Cf2.2 Ci5.2 Ci6.1 Ddtr.2 Dr1.2 Dr2.2 Dtr?.1 Plcd.2 Ppote.3 Prel1.4 Prel2.4 Rdtr2.2 ref.2 Rlcd.1 U5V.3 U328.7 U328.20 Umux.16 | length 324.7
  Top Layer w0.5: v1(52.832,2.286) v1(66.167,2.286) ; v1(76.2,-41.529) v1(95.25,-41.529)
  Top Layer w1: v1(-11.684,-25.654) v1(-11.684,-19.908) ; v1(-5.08,-28.194) v1(2.54,-28.194) ; v1(7.239,-8.382) v1(7.239,-3.048) ; v1(27.559,-26.162) v1(50.165,-26.162) ; v1(76.2,-37.338) v1(76.2,-30.607)
  Bottom Layer w0.5: Dtr?.1 v1(66.167,2.286)
  Bottom Layer w1: Ci5.2 -26.543,-16.129 -24.257,-18.415 U5V.3 -20.701,-20.32 -20.289,-19.908 Ci6.1 v1(-11.684,-19.908) ; Ci6.1@-16.558,-20.066 Ci6.1@-16.51,-20.114 ; v1(-11.684,-25.654) -7.62,-25.654 ; v1(-5.08,-28.194) -6.731,-28.194 -7.62,-27.305 -7.62,-25.654 ; v1(2.54,-28.194) Umux.16 4.699,-30.607 5.08,-30.988 Cf1.2 26.416,-30.988 27.559,-29.845 v1(27.559,-26.162) U328.20 Cf2.2 ; v1(7.239,-8.382) Ppote.3 1.778,-11.938 -0.762,-14.478 ref.2 -0.762,-21.844 -4.572,-25.654 -7.62,-25.654 ; v1(7.239,-3.048) 9.271,-3.048 9.779,-2.54 Plcd.2 ; U328.7 32.639,-17.145 33.655,-18.161 76.2,-18.161 ; Rlcd.1 49.022,3.048 49.784,2.286 v1(52.832,2.286) ; v1(50.165,-26.162) 76.2,-26.162 ; Dtr?.1 73.66,0 76.2,-2.54 76.2,-18.161 ; Rdtr2.2 Ddtr.2 ; Prel2.4 76.2,-49.8 Dr2.2 v1(76.2,-41.529) v1(76.2,-37.338) ; v1(76.2,-30.607) 76.2,-26.162 ; Prel1.4 95.25,-49.775 Dr1.2 v1(95.25,-41.529) ; 76.2,-26.162 76.2,-18.161
VCCs: Ci9.1 D1.2 Pucc1.1 Pucc2.1 Radj.2 Rt1.2 Rt2.2 Useñal.2 | length 140.4
  Top Layer w1: v1(-23.241,-60.071) v1(-19.431,-60.071) ; v1(-12.954,-60.071) v1(-9.525,-60.071) ; v1(-8.382,-60.071) -3.556,-60.071 v1(-3.429,-59.944)
  Bottom Layer w1: Useñal.2 -18.923,-10.795 -18.288,-10.16 D1.2 ; v1(-23.241,-60.071) Rt1.2 -29.972,-60.071 -35.433,-54.61 -35.433,-10.668 -27.305,-2.54 -21.844,-2.54 -18.565,-5.819 D1.2 ; v1(-19.431,-60.071) Rt2.2 v1(-12.954,-60.071) ; Radj.2 -15.24,-7.366 -15.24,-5.715 ; Ci9.1 -11.636,-2.111 -15.24,-5.715 ; Pucc2.1 -9.779,-63.754 -8.382,-62.357 v1(-8.382,-60.071) v1(-9.525,-60.071) ; v1(-3.429,-59.944) 2.286,-59.944 3.683,-61.341 Pucc1.1 ; D1.2 -15.344,-5.819 -15.24,-5.715
pads on no net: P0.3 P0.4 P0.5 P0.6 P1.3 P1.4 P1.5 P1.6 P2.3 P2.4 P2.5 P2.6 P3.3 P3.4 P3.5 P3.6 Pc1.2 Pc1.3 Pc2.2 Pc2.3 Pgnd1.2 Pgnd1.3 Pgnd2.2 Pgnd2.3 Plcd.7 Plcd.8 Plcd.9 Plcd.10 Pterm1.3 Pterm1.4 Pterm1.5 Pterm1.6 Pterm2.3 Pterm2.4 Pterm2.5 Pterm2.6 Pucc1.2 Pucc1.3 Pucc2.2 Pucc2.3
copper on no net:
  other v2: 101.346,-72.263 0,-55.118 -35.306,0 0,0 93.091,0

## Silkscreen, mask and mechanical layers (free items; w line width, h text height)
Top Paste:
  lines w0.2: -39.624,-77.597 105.283,-77.597 105.283,5.207 -39.624,5.207 -39.624,-77.597
Mechanical 1:
  the board outline again, w0.2

## Dimensions
-39.624,5.207 to -39.624,-77.597 on Top Overlay
-39.624,5.207 to 105.283,5.207 on Top Overlay

## Text inside footprints (layer, text, board x,y; h text height)
Prel1: Top Overlay "-" at 83.439,-51.689 h0.52 r270; Top Overlay "+" at 94.361,-51.689 h0.52 r270; Top Overlay "NC" at 94.742,-57.15 h0.52 r270; Top Overlay "NA" at 83.566,-57.023 h0.52 r270
Prel2: Top Overlay "-" at 64.428,-51.675 h0.52 r270; Top Overlay "+" at 75.35,-51.675 h0.52 r270; Top Overlay "NC" at 75.731,-57.136 h0.52 r270; Top Overlay "NA" at 64.555,-57.009 h0.52 r270
U5V: Top Overlay "3" at -20.082,-20.82 h1.5 r90; Top Overlay "2" at -20.082,-23.36 h1.5 r90; Top Overlay "1" at -20.082,-25.65 h1.5 r90
U9V: Top Overlay "3" at -20.082,-32.885 h1.5 r90; Top Overlay "2" at -20.082,-35.425 h1.5 r90; Top Overlay "1" at -20.082,-37.715 h1.5 r90
Useñal: Top Overlay "3" at -20.082,-8.755 h1.5 r90; Top Overlay "2" at -20.082,-11.295 h1.5 r90; Top Overlay "1" at -20.082,-13.585 h1.5 r90